# EAGLE board Qwiic_MLX90393_Magnetometer-Panel_v10 (EAGLE 7.7.0), part 1 of 6
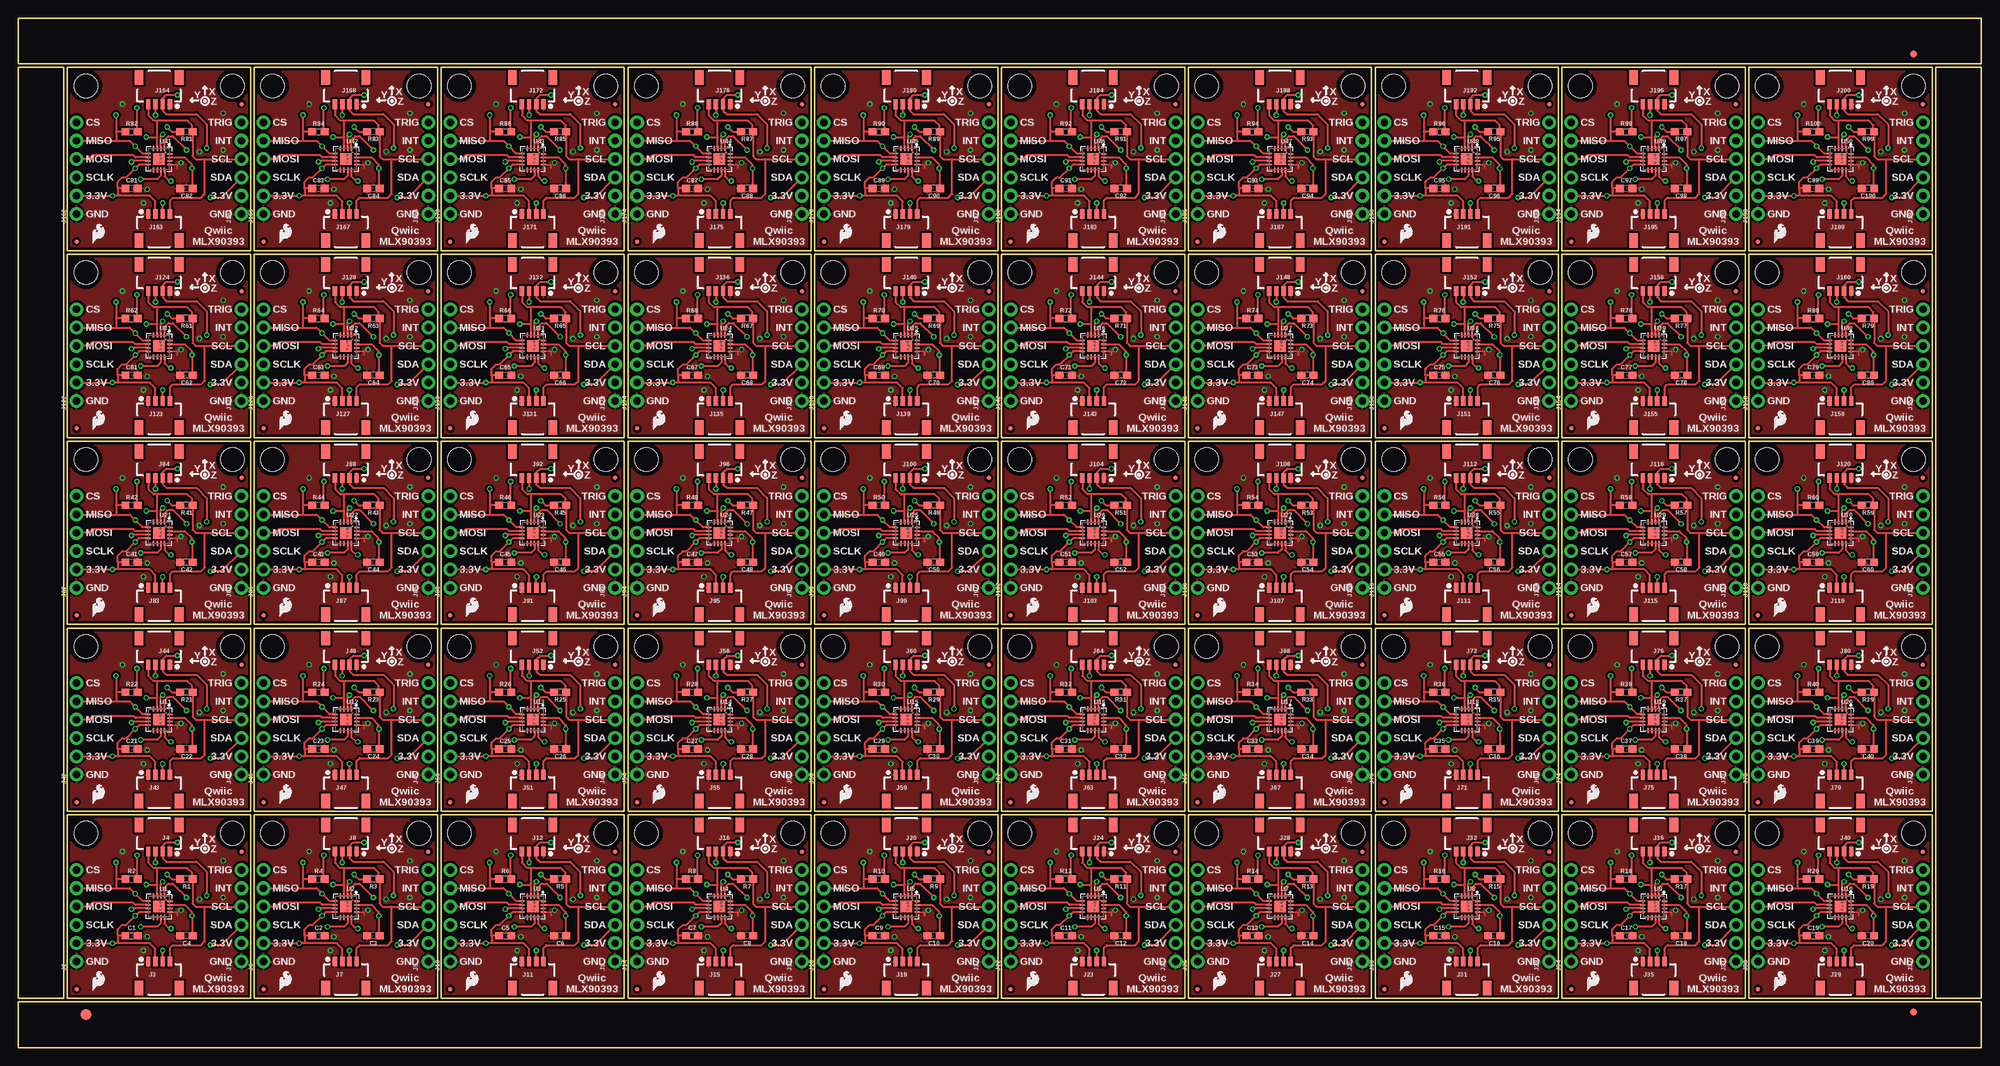
[diagram p0: board, top side]
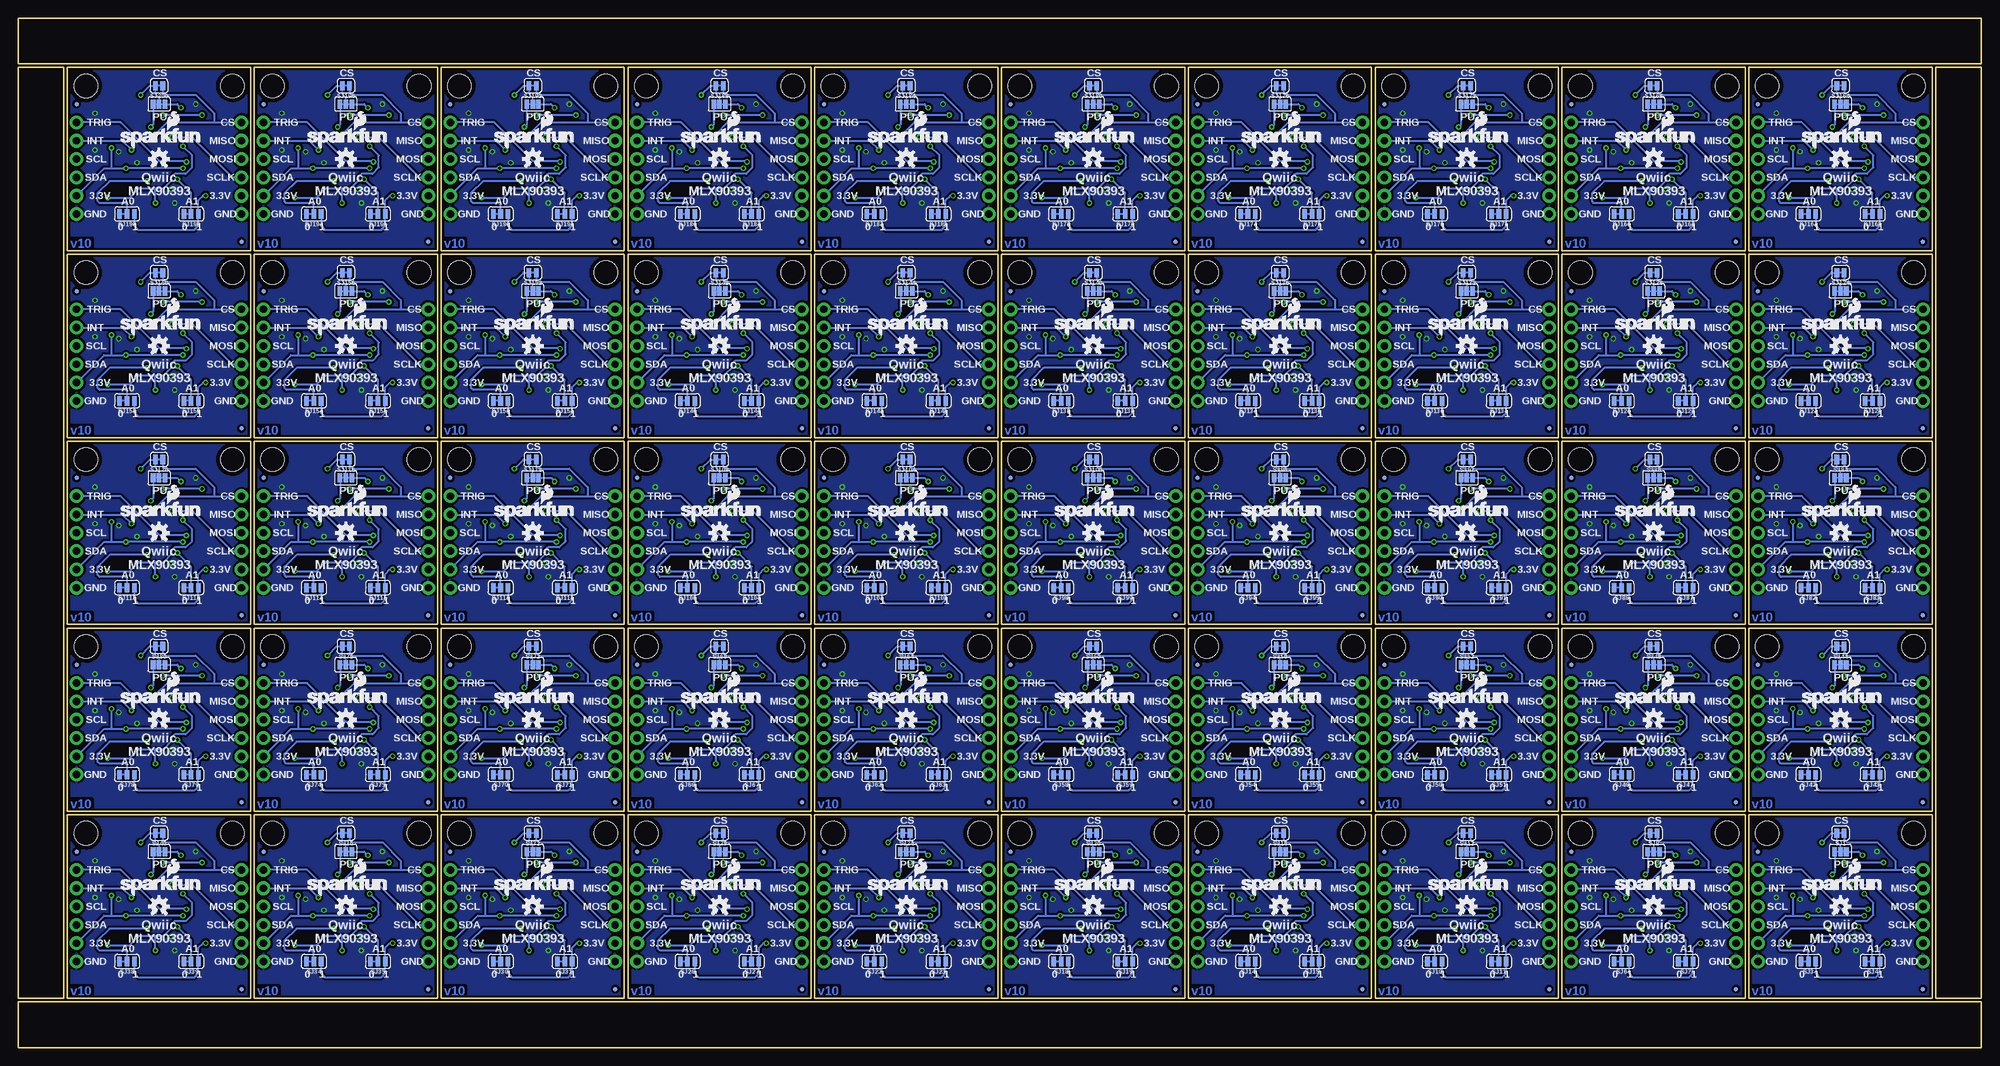
[diagram p1: board, bottom side, seen from below]

Size 272.29 x 142.75 mm. Coordinates in mm from the lower left corner, seen from the top.
Outline: 224 segments
Copper layers (1*16): Top 0.035mm / dielectric 1.5mm / Bottom 0.035mm
Design rules "SparkFun-2-layer-TIGHT": minimum track width 7mil, minimum drill 15mil, track to track 7mil, track to pad 7mil, pad to pad 7mil, via to via 7mil, smd to smd 7mil, copper to edge 7mil, drill to drill 7mil, minimum pad ring 7mil, minimum via ring 7mil, stop-mask expansion 4mil, vias tented up to drill 25mil, thermal gap 10mil

## Footprints (pad centres in the part's own frame; a part is rotated, then mirrored left to right if it is on the bottom)
0603 = smd 1.1 x 1: 1 -0.85,0; 2 0.85,0
FIDUCIAL-1.5X3 = smd 1.5 x 1.5: 1 0,0
FIDUCIAL-1X2 = smd 1 x 1: 1 0,0
FIDUCIAL-MICRO = smd 0.635 x 0.635: 1 0,0
1X06_NO_SILK = drill 1.016 pad 1.88: 1 0,0; 2 2.54,0; 3 5.08,0; 4 7.62,0; 5 10.16,0; 6 12.7,0
1X04_1MM_RA = smd 0.6 x 1.35: 1 -1.5,0; 2 -0.5,0; 3 0.5,0; 4 1.5,0 | smd 1.2 x 2: NC1 2.8,-3.675; NC2 -2.8,-3.675
STAND-OFF = hole 3.302: 0,0
SMT-JUMPER_2_NC_TRACE_SILK = smd 0.635 x 1.27: 1 -0.508,0; 2 0.508,0
PAD-JUMPER-3-3OF3_NC_BY_TRACE_YES_SILK_FULL_BOX = smd 0.635 x 1.27: 1 -0.813,0; 2 0,0; 3 0.813,0
SMT-JUMPER_3_1-NC_TRACE_SILK = smd 0.635 x 1.27: 1 -1.016,0; 2 0,0; 3 1.016,0
QFN-16_WITH_AXIES = smd 0.3 x 0.85: 1 0.754,1.498; 2 0.254,1.498; 3 -0.246,1.498; 4 -0.746,1.498; 9 -0.746,-1.506; 10 -0.246,-1.506; 11 0.254,-1.506; 12 0.754,-1.506 | smd 0.85 x 0.3: 5 -1.508,0.746; 6 -1.508,0.246; 7 -1.508,-0.254; 8 -1.508,-0.754; 13 1.496,-0.764; 14 1.496,-0.264; 15 1.496,0.236; 16 1.496,0.736 | smd 1.6 x 1.6: 17 0,0

## Placement (x,y rotation side)
C1  0.1uF  [0603]  15.75,15.49 0 top
C2  0.1uF  [0603]  41.66,15.49 0 top
C3  0.1uF  [0603]  49.28,15.49 180 top
C4  0.1uF  [0603]  23.37,15.49 180 top
C5  0.1uF  [0603]  67.56,15.49 0 top
C6  0.1uF  [0603]  75.18,15.49 180 top
C7  0.1uF  [0603]  93.47,15.49 0 top
C8  0.1uF  [0603]  101.09,15.49 180 top
C9  0.1uF  [0603]  119.38,15.49 0 top
C10  0.1uF  [0603]  127,15.49 180 top
C11  0.1uF  [0603]  145.29,15.49 0 top
C12  0.1uF  [0603]  152.91,15.49 180 top
C13  0.1uF  [0603]  171.2,15.49 0 top
C14  0.1uF  [0603]  178.82,15.49 180 top
C15  0.1uF  [0603]  197.1,15.49 0 top
C16  0.1uF  [0603]  204.72,15.49 180 top
C17  0.1uF  [0603]  223.01,15.49 0 top
C18  0.1uF  [0603]  230.63,15.49 180 top
C19  0.1uF  [0603]  248.92,15.49 0 top
C20  0.1uF  [0603]  256.54,15.49 180 top
C21  0.1uF  [0603]  15.75,41.4 0 top
C22  0.1uF  [0603]  23.37,41.4 180 top
C23  0.1uF  [0603]  41.66,41.4 0 top
C24  0.1uF  [0603]  49.28,41.4 180 top
C25  0.1uF  [0603]  67.56,41.4 0 top
C26  0.1uF  [0603]  75.18,41.4 180 top
C27  0.1uF  [0603]  93.47,41.4 0 top
C28  0.1uF  [0603]  101.09,41.4 180 top
C29  0.1uF  [0603]  119.38,41.4 0 top
C30  0.1uF  [0603]  127,41.4 180 top
C31  0.1uF  [0603]  145.29,41.4 0 top
C32  0.1uF  [0603]  152.91,41.4 180 top
C33  0.1uF  [0603]  171.2,41.4 0 top
C34  0.1uF  [0603]  178.82,41.4 180 top
C35  0.1uF  [0603]  197.1,41.4 0 top
C36  0.1uF  [0603]  204.72,41.4 180 top
C37  0.1uF  [0603]  223.01,41.4 0 top
C38  0.1uF  [0603]  230.63,41.4 180 top
C39  0.1uF  [0603]  248.92,41.4 0 top
C40  0.1uF  [0603]  256.54,41.4 180 top
C41  0.1uF  [0603]  15.75,67.31 0 top
C42  0.1uF  [0603]  23.37,67.31 180 top
C43  0.1uF  [0603]  41.66,67.31 0 top
C44  0.1uF  [0603]  49.28,67.31 180 top
C45  0.1uF  [0603]  67.56,67.31 0 top
C46  0.1uF  [0603]  75.18,67.31 180 top
C47  0.1uF  [0603]  93.47,67.31 0 top
C48  0.1uF  [0603]  101.09,67.31 180 top
C49  0.1uF  [0603]  119.38,67.31 0 top
C50  0.1uF  [0603]  127,67.31 180 top
C51  0.1uF  [0603]  145.29,67.31 0 top
C52  0.1uF  [0603]  152.91,67.31 180 top
C53  0.1uF  [0603]  171.2,67.31 0 top
C54  0.1uF  [0603]  178.82,67.31 180 top
C55  0.1uF  [0603]  197.1,67.31 0 top
C56  0.1uF  [0603]  204.72,67.31 180 top
C57  0.1uF  [0603]  223.01,67.31 0 top
C58  0.1uF  [0603]  230.63,67.31 180 top
C59  0.1uF  [0603]  248.92,67.31 0 top
C60  0.1uF  [0603]  256.54,67.31 180 top
C61  0.1uF  [0603]  15.75,93.22 0 top
C62  0.1uF  [0603]  23.37,93.22 180 top
C63  0.1uF  [0603]  41.66,93.22 0 top
C64  0.1uF  [0603]  49.28,93.22 180 top
C65  0.1uF  [0603]  67.56,93.22 0 top
C66  0.1uF  [0603]  75.18,93.22 180 top
C67  0.1uF  [0603]  93.47,93.22 0 top
C68  0.1uF  [0603]  101.09,93.22 180 top
C69  0.1uF  [0603]  119.38,93.22 0 top
C70  0.1uF  [0603]  127,93.22 180 top
C71  0.1uF  [0603]  145.29,93.22 0 top
C72  0.1uF  [0603]  152.91,93.22 180 top
C73  0.1uF  [0603]  171.2,93.22 0 top
C74  0.1uF  [0603]  178.82,93.22 180 top
C75  0.1uF  [0603]  197.1,93.22 0 top
C76  0.1uF  [0603]  204.72,93.22 180 top
C77  0.1uF  [0603]  223.01,93.22 0 top
C78  0.1uF  [0603]  230.63,93.22 180 top
C79  0.1uF  [0603]  248.92,93.22 0 top
C80  0.1uF  [0603]  256.54,93.22 180 top
C81  0.1uF  [0603]  15.75,119.13 0 top
C82  0.1uF  [0603]  23.37,119.13 180 top
C83  0.1uF  [0603]  41.66,119.13 0 top
C84  0.1uF  [0603]  49.28,119.13 180 top
C85  0.1uF  [0603]  67.56,119.13 0 top
C86  0.1uF  [0603]  75.18,119.13 180 top
C87  0.1uF  [0603]  93.47,119.13 0 top
C88  0.1uF  [0603]  101.09,119.13 180 top
C89  0.1uF  [0603]  119.38,119.13 0 top
C90  0.1uF  [0603]  127,119.13 180 top
C91  0.1uF  [0603]  145.29,119.13 0 top
C92  0.1uF  [0603]  152.91,119.13 180 top
C93  0.1uF  [0603]  171.2,119.13 0 top
C94  0.1uF  [0603]  178.82,119.13 180 top
C95  0.1uF  [0603]  197.1,119.13 0 top
C96  0.1uF  [0603]  204.72,119.13 180 top
C97  0.1uF  [0603]  223.01,119.13 0 top
C98  0.1uF  [0603]  230.63,119.13 180 top
C99  0.1uF  [0603]  248.92,119.13 0 top
C100  0.1uF  [0603]  256.54,119.13 180 top
E$1  [FIDUCIAL-1.5X3]  9.4,4.57 0 top
E$6  [FIDUCIAL-1X2]  262.89,4.95 90 top
E$7  [FIDUCIAL-1X2]  262.89,137.79 90 top
FD1  FIDUCIALUFIDUCIAL  [FIDUCIAL-MICRO]  8.13,8.13 0 top
FD2  FIDUCIALUFIDUCIAL  [FIDUCIAL-MICRO]  8.13,8.13 0 bottom
FD3  FIDUCIALUFIDUCIAL  [FIDUCIAL-MICRO]  30.99,27.18 0 top
FD4  FIDUCIALUFIDUCIAL  [FIDUCIAL-MICRO]  30.99,27.18 0 bottom
FD5  FIDUCIALUFIDUCIAL  [FIDUCIAL-MICRO]  34.04,8.13 0 top
FD6  FIDUCIALUFIDUCIAL  [FIDUCIAL-MICRO]  34.04,8.13 0 bottom
FD7  FIDUCIALUFIDUCIAL  [FIDUCIAL-MICRO]  56.9,27.18 0 top
FD8  FIDUCIALUFIDUCIAL  [FIDUCIAL-MICRO]  56.9,27.18 0 bottom
FD9  FIDUCIALUFIDUCIAL  [FIDUCIAL-MICRO]  59.94,8.13 0 top
FD10  FIDUCIALUFIDUCIAL  [FIDUCIAL-MICRO]  59.94,8.13 0 bottom
FD11  FIDUCIALUFIDUCIAL  [FIDUCIAL-MICRO]  82.8,27.18 0 top
FD12  FIDUCIALUFIDUCIAL  [FIDUCIAL-MICRO]  82.8,27.18 0 bottom
FD13  FIDUCIALUFIDUCIAL  [FIDUCIAL-MICRO]  85.85,8.13 0 top
FD14  FIDUCIALUFIDUCIAL  [FIDUCIAL-MICRO]  85.85,8.13 0 bottom
FD15  FIDUCIALUFIDUCIAL  [FIDUCIAL-MICRO]  108.71,27.18 0 top
FD16  FIDUCIALUFIDUCIAL  [FIDUCIAL-MICRO]  108.71,27.18 0 bottom
FD17  FIDUCIALUFIDUCIAL  [FIDUCIAL-MICRO]  111.76,8.13 0 top
FD18  FIDUCIALUFIDUCIAL  [FIDUCIAL-MICRO]  111.76,8.13 0 bottom
FD19  FIDUCIALUFIDUCIAL  [FIDUCIAL-MICRO]  134.62,27.18 0 top
FD20  FIDUCIALUFIDUCIAL  [FIDUCIAL-MICRO]  134.62,27.18 0 bottom
FD21  FIDUCIALUFIDUCIAL  [FIDUCIAL-MICRO]  137.67,8.13 0 top
FD22  FIDUCIALUFIDUCIAL  [FIDUCIAL-MICRO]  137.67,8.13 0 bottom
FD23  FIDUCIALUFIDUCIAL  [FIDUCIAL-MICRO]  160.53,27.18 0 top
FD24  FIDUCIALUFIDUCIAL  [FIDUCIAL-MICRO]  160.53,27.18 0 bottom
FD25  FIDUCIALUFIDUCIAL  [FIDUCIAL-MICRO]  163.58,8.13 0 top
FD26  FIDUCIALUFIDUCIAL  [FIDUCIAL-MICRO]  163.58,8.13 0 bottom
FD27  FIDUCIALUFIDUCIAL  [FIDUCIAL-MICRO]  186.44,27.18 0 top
FD28  FIDUCIALUFIDUCIAL  [FIDUCIAL-MICRO]  186.44,27.18 0 bottom
FD29  FIDUCIALUFIDUCIAL  [FIDUCIAL-MICRO]  189.48,8.13 0 top
FD30  FIDUCIALUFIDUCIAL  [FIDUCIAL-MICRO]  189.48,8.13 0 bottom
FD31  FIDUCIALUFIDUCIAL  [FIDUCIAL-MICRO]  212.34,27.18 0 top
FD32  FIDUCIALUFIDUCIAL  [FIDUCIAL-MICRO]  212.34,27.18 0 bottom
FD33  FIDUCIALUFIDUCIAL  [FIDUCIAL-MICRO]  215.39,8.13 0 top
FD34  FIDUCIALUFIDUCIAL  [FIDUCIAL-MICRO]  215.39,8.13 0 bottom
FD35  FIDUCIALUFIDUCIAL  [FIDUCIAL-MICRO]  238.25,27.18 0 top
FD36  FIDUCIALUFIDUCIAL  [FIDUCIAL-MICRO]  238.25,27.18 0 bottom
FD37  FIDUCIALUFIDUCIAL  [FIDUCIAL-MICRO]  241.3,8.13 0 top
FD38  FIDUCIALUFIDUCIAL  [FIDUCIAL-MICRO]  241.3,8.13 0 bottom
FD39  FIDUCIALUFIDUCIAL  [FIDUCIAL-MICRO]  264.16,27.18 0 top
FD40  FIDUCIALUFIDUCIAL  [FIDUCIAL-MICRO]  264.16,27.18 0 bottom
FD41  FIDUCIALUFIDUCIAL  [FIDUCIAL-MICRO]  8.13,34.04 0 top
FD42  FIDUCIALUFIDUCIAL  [FIDUCIAL-MICRO]  8.13,34.04 0 bottom
FD43  FIDUCIALUFIDUCIAL  [FIDUCIAL-MICRO]  30.99,53.09 0 top
FD44  FIDUCIALUFIDUCIAL  [FIDUCIAL-MICRO]  30.99,53.09 0 bottom
FD45  FIDUCIALUFIDUCIAL  [FIDUCIAL-MICRO]  34.04,34.04 0 top
FD46  FIDUCIALUFIDUCIAL  [FIDUCIAL-MICRO]  34.04,34.04 0 bottom
FD47  FIDUCIALUFIDUCIAL  [FIDUCIAL-MICRO]  56.9,53.09 0 top
FD48  FIDUCIALUFIDUCIAL  [FIDUCIAL-MICRO]  56.9,53.09 0 bottom
FD49  FIDUCIALUFIDUCIAL  [FIDUCIAL-MICRO]  59.94,34.04 0 top
FD50  FIDUCIALUFIDUCIAL  [FIDUCIAL-MICRO]  59.94,34.04 0 bottom
FD51  FIDUCIALUFIDUCIAL  [FIDUCIAL-MICRO]  82.8,53.09 0 top
FD52  FIDUCIALUFIDUCIAL  [FIDUCIAL-MICRO]  82.8,53.09 0 bottom
FD53  FIDUCIALUFIDUCIAL  [FIDUCIAL-MICRO]  85.85,34.04 0 top
FD54  FIDUCIALUFIDUCIAL  [FIDUCIAL-MICRO]  85.85,34.04 0 bottom
FD55  FIDUCIALUFIDUCIAL  [FIDUCIAL-MICRO]  108.71,53.09 0 top
FD56  FIDUCIALUFIDUCIAL  [FIDUCIAL-MICRO]  108.71,53.09 0 bottom
FD57  FIDUCIALUFIDUCIAL  [FIDUCIAL-MICRO]  111.76,34.04 0 top
FD58  FIDUCIALUFIDUCIAL  [FIDUCIAL-MICRO]  111.76,34.04 0 bottom
FD59  FIDUCIALUFIDUCIAL  [FIDUCIAL-MICRO]  134.62,53.09 0 top
FD60  FIDUCIALUFIDUCIAL  [FIDUCIAL-MICRO]  134.62,53.09 0 bottom
FD61  FIDUCIALUFIDUCIAL  [FIDUCIAL-MICRO]  137.67,34.04 0 top
FD62  FIDUCIALUFIDUCIAL  [FIDUCIAL-MICRO]  137.67,34.04 0 bottom
FD63  FIDUCIALUFIDUCIAL  [FIDUCIAL-MICRO]  160.53,53.09 0 top
FD64  FIDUCIALUFIDUCIAL  [FIDUCIAL-MICRO]  160.53,53.09 0 bottom
FD65  FIDUCIALUFIDUCIAL  [FIDUCIAL-MICRO]  163.58,34.04 0 top
FD66  FIDUCIALUFIDUCIAL  [FIDUCIAL-MICRO]  163.58,34.04 0 bottom
FD67  FIDUCIALUFIDUCIAL  [FIDUCIAL-MICRO]  186.44,53.09 0 top
FD68  FIDUCIALUFIDUCIAL  [FIDUCIAL-MICRO]  186.44,53.09 0 bottom
FD69  FIDUCIALUFIDUCIAL  [FIDUCIAL-MICRO]  189.48,34.04 0 top
FD70  FIDUCIALUFIDUCIAL  [FIDUCIAL-MICRO]  189.48,34.04 0 bottom
FD71  FIDUCIALUFIDUCIAL  [FIDUCIAL-MICRO]  212.34,53.09 0 top
FD72  FIDUCIALUFIDUCIAL  [FIDUCIAL-MICRO]  212.34,53.09 0 bottom
FD73  FIDUCIALUFIDUCIAL  [FIDUCIAL-MICRO]  215.39,34.04 0 top
FD74  FIDUCIALUFIDUCIAL  [FIDUCIAL-MICRO]  215.39,34.04 0 bottom
FD75  FIDUCIALUFIDUCIAL  [FIDUCIAL-MICRO]  238.25,53.09 0 top
FD76  FIDUCIALUFIDUCIAL  [FIDUCIAL-MICRO]  238.25,53.09 0 bottom
FD77  FIDUCIALUFIDUCIAL  [FIDUCIAL-MICRO]  241.3,34.04 0 top
FD78  FIDUCIALUFIDUCIAL  [FIDUCIAL-MICRO]  241.3,34.04 0 bottom
FD79  FIDUCIALUFIDUCIAL  [FIDUCIAL-MICRO]  264.16,53.09 0 top
FD80  FIDUCIALUFIDUCIAL  [FIDUCIAL-MICRO]  264.16,53.09 0 bottom
FD81  FIDUCIALUFIDUCIAL  [FIDUCIAL-MICRO]  8.13,59.94 0 top
FD82  FIDUCIALUFIDUCIAL  [FIDUCIAL-MICRO]  8.13,59.94 0 bottom
FD83  FIDUCIALUFIDUCIAL  [FIDUCIAL-MICRO]  30.99,78.99 0 top
FD84  FIDUCIALUFIDUCIAL  [FIDUCIAL-MICRO]  30.99,78.99 0 bottom
FD85  FIDUCIALUFIDUCIAL  [FIDUCIAL-MICRO]  34.04,59.94 0 top
FD86  FIDUCIALUFIDUCIAL  [FIDUCIAL-MICRO]  34.04,59.94 0 bottom
FD87  FIDUCIALUFIDUCIAL  [FIDUCIAL-MICRO]  56.9,78.99 0 top
FD88  FIDUCIALUFIDUCIAL  [FIDUCIAL-MICRO]  56.9,78.99 0 bottom
FD89  FIDUCIALUFIDUCIAL  [FIDUCIAL-MICRO]  59.94,59.94 0 top
FD90  FIDUCIALUFIDUCIAL  [FIDUCIAL-MICRO]  59.94,59.94 0 bottom
FD91  FIDUCIALUFIDUCIAL  [FIDUCIAL-MICRO]  82.8,78.99 0 top
FD92  FIDUCIALUFIDUCIAL  [FIDUCIAL-MICRO]  82.8,78.99 0 bottom
FD93  FIDUCIALUFIDUCIAL  [FIDUCIAL-MICRO]  85.85,59.94 0 top
FD94  FIDUCIALUFIDUCIAL  [FIDUCIAL-MICRO]  85.85,59.94 0 bottom
FD95  FIDUCIALUFIDUCIAL  [FIDUCIAL-MICRO]  108.71,78.99 0 top
FD96  FIDUCIALUFIDUCIAL  [FIDUCIAL-MICRO]  108.71,78.99 0 bottom
FD97  FIDUCIALUFIDUCIAL  [FIDUCIAL-MICRO]  111.76,59.94 0 top
FD98  FIDUCIALUFIDUCIAL  [FIDUCIAL-MICRO]  111.76,59.94 0 bottom
FD99  FIDUCIALUFIDUCIAL  [FIDUCIAL-MICRO]  134.62,78.99 0 top
FD100  FIDUCIALUFIDUCIAL  [FIDUCIAL-MICRO]  134.62,78.99 0 bottom
FD101  FIDUCIALUFIDUCIAL  [FIDUCIAL-MICRO]  137.67,59.94 0 top
FD102  FIDUCIALUFIDUCIAL  [FIDUCIAL-MICRO]  137.67,59.94 0 bottom
FD103  FIDUCIALUFIDUCIAL  [FIDUCIAL-MICRO]  160.53,78.99 0 top
FD104  FIDUCIALUFIDUCIAL  [FIDUCIAL-MICRO]  160.53,78.99 0 bottom
FD105  FIDUCIALUFIDUCIAL  [FIDUCIAL-MICRO]  163.58,59.94 0 top
FD106  FIDUCIALUFIDUCIAL  [FIDUCIAL-MICRO]  163.58,59.94 0 bottom
FD107  FIDUCIALUFIDUCIAL  [FIDUCIAL-MICRO]  186.44,78.99 0 top
FD108  FIDUCIALUFIDUCIAL  [FIDUCIAL-MICRO]  186.44,78.99 0 bottom
FD109  FIDUCIALUFIDUCIAL  [FIDUCIAL-MICRO]  189.48,59.94 0 top
FD110  FIDUCIALUFIDUCIAL  [FIDUCIAL-MICRO]  189.48,59.94 0 bottom
FD111  FIDUCIALUFIDUCIAL  [FIDUCIAL-MICRO]  212.34,78.99 0 top
FD112  FIDUCIALUFIDUCIAL  [FIDUCIAL-MICRO]  212.34,78.99 0 bottom
FD113  FIDUCIALUFIDUCIAL  [FIDUCIAL-MICRO]  215.39,59.94 0 top
FD114  FIDUCIALUFIDUCIAL  [FIDUCIAL-MICRO]  215.39,59.94 0 bottom
FD115  FIDUCIALUFIDUCIAL  [FIDUCIAL-MICRO]  238.25,78.99 0 top
FD116  FIDUCIALUFIDUCIAL  [FIDUCIAL-MICRO]  238.25,78.99 0 bottom
FD117  FIDUCIALUFIDUCIAL  [FIDUCIAL-MICRO]  241.3,59.94 0 top
FD118  FIDUCIALUFIDUCIAL  [FIDUCIAL-MICRO]  241.3,59.94 0 bottom
FD119  FIDUCIALUFIDUCIAL  [FIDUCIAL-MICRO]  264.16,78.99 0 top
FD120  FIDUCIALUFIDUCIAL  [FIDUCIAL-MICRO]  264.16,78.99 0 bottom
FD121  FIDUCIALUFIDUCIAL  [FIDUCIAL-MICRO]  8.13,85.85 0 top
FD122  FIDUCIALUFIDUCIAL  [FIDUCIAL-MICRO]  8.13,85.85 0 bottom
FD123  FIDUCIALUFIDUCIAL  [FIDUCIAL-MICRO]  30.99,104.9 0 top
FD124  FIDUCIALUFIDUCIAL  [FIDUCIAL-MICRO]  30.99,104.9 0 bottom
FD125  FIDUCIALUFIDUCIAL  [FIDUCIAL-MICRO]  34.04,85.85 0 top
FD126  FIDUCIALUFIDUCIAL  [FIDUCIAL-MICRO]  34.04,85.85 0 bottom
FD127  FIDUCIALUFIDUCIAL  [FIDUCIAL-MICRO]  56.9,104.9 0 top
FD128  FIDUCIALUFIDUCIAL  [FIDUCIAL-MICRO]  56.9,104.9 0 bottom
FD129  FIDUCIALUFIDUCIAL  [FIDUCIAL-MICRO]  59.94,85.85 0 top
FD130  FIDUCIALUFIDUCIAL  [FIDUCIAL-MICRO]  59.94,85.85 0 bottom
FD131  FIDUCIALUFIDUCIAL  [FIDUCIAL-MICRO]  82.8,104.9 0 top
FD132  FIDUCIALUFIDUCIAL  [FIDUCIAL-MICRO]  82.8,104.9 0 bottom
FD133  FIDUCIALUFIDUCIAL  [FIDUCIAL-MICRO]  85.85,85.85 0 top
FD134  FIDUCIALUFIDUCIAL  [FIDUCIAL-MICRO]  85.85,85.85 0 bottom
FD135  FIDUCIALUFIDUCIAL  [FIDUCIAL-MICRO]  108.71,104.9 0 top
FD136  FIDUCIALUFIDUCIAL  [FIDUCIAL-MICRO]  108.71,104.9 0 bottom
FD137  FIDUCIALUFIDUCIAL  [FIDUCIAL-MICRO]  111.76,85.85 0 top
FD138  FIDUCIALUFIDUCIAL  [FIDUCIAL-MICRO]  111.76,85.85 0 bottom
FD139  FIDUCIALUFIDUCIAL  [FIDUCIAL-MICRO]  134.62,104.9 0 top
FD140  FIDUCIALUFIDUCIAL  [FIDUCIAL-MICRO]  134.62,104.9 0 bottom
FD141  FIDUCIALUFIDUCIAL  [FIDUCIAL-MICRO]  137.67,85.85 0 top
FD142  FIDUCIALUFIDUCIAL  [FIDUCIAL-MICRO]  137.67,85.85 0 bottom
FD143  FIDUCIALUFIDUCIAL  [FIDUCIAL-MICRO]  160.53,104.9 0 top
FD144  FIDUCIALUFIDUCIAL  [FIDUCIAL-MICRO]  160.53,104.9 0 bottom
FD145  FIDUCIALUFIDUCIAL  [FIDUCIAL-MICRO]  163.58,85.85 0 top
FD146  FIDUCIALUFIDUCIAL  [FIDUCIAL-MICRO]  163.58,85.85 0 bottom
FD147  FIDUCIALUFIDUCIAL  [FIDUCIAL-MICRO]  186.44,104.9 0 top
FD148  FIDUCIALUFIDUCIAL  [FIDUCIAL-MICRO]  186.44,104.9 0 bottom
FD149  FIDUCIALUFIDUCIAL  [FIDUCIAL-MICRO]  189.48,85.85 0 top
FD150  FIDUCIALUFIDUCIAL  [FIDUCIAL-MICRO]  189.48,85.85 0 bottom
FD151  FIDUCIALUFIDUCIAL  [FIDUCIAL-MICRO]  212.34,104.9 0 top
FD152  FIDUCIALUFIDUCIAL  [FIDUCIAL-MICRO]  212.34,104.9 0 bottom
FD153  FIDUCIALUFIDUCIAL  [FIDUCIAL-MICRO]  215.39,85.85 0 top
FD154  FIDUCIALUFIDUCIAL  [FIDUCIAL-MICRO]  215.39,85.85 0 bottom
FD155  FIDUCIALUFIDUCIAL  [FIDUCIAL-MICRO]  238.25,104.9 0 top
FD156  FIDUCIALUFIDUCIAL  [FIDUCIAL-MICRO]  238.25,104.9 0 bottom
FD157  FIDUCIALUFIDUCIAL  [FIDUCIAL-MICRO]  241.3,85.85 0 top
FD158  FIDUCIALUFIDUCIAL  [FIDUCIAL-MICRO]  241.3,85.85 0 bottom
FD159  FIDUCIALUFIDUCIAL  [FIDUCIAL-MICRO]  264.16,104.9 0 top
FD160  FIDUCIALUFIDUCIAL  [FIDUCIAL-MICRO]  264.16,104.9 0 bottom
FD161  FIDUCIALUFIDUCIAL  [FIDUCIAL-MICRO]  8.13,111.76 0 top
FD162  FIDUCIALUFIDUCIAL  [FIDUCIAL-MICRO]  8.13,111.76 0 bottom
FD163  FIDUCIALUFIDUCIAL  [FIDUCIAL-MICRO]  30.99,130.81 0 top
FD164  FIDUCIALUFIDUCIAL  [FIDUCIAL-MICRO]  30.99,130.81 0 bottom
FD165  FIDUCIALUFIDUCIAL  [FIDUCIAL-MICRO]  34.04,111.76 0 top
FD166  FIDUCIALUFIDUCIAL  [FIDUCIAL-MICRO]  34.04,111.76 0 bottom
FD167  FIDUCIALUFIDUCIAL  [FIDUCIAL-MICRO]  56.9,130.81 0 top
FD168  FIDUCIALUFIDUCIAL  [FIDUCIAL-MICRO]  56.9,130.81 0 bottom
FD169  FIDUCIALUFIDUCIAL  [FIDUCIAL-MICRO]  59.94,111.76 0 top
FD170  FIDUCIALUFIDUCIAL  [FIDUCIAL-MICRO]  59.94,111.76 0 bottom
FD171  FIDUCIALUFIDUCIAL  [FIDUCIAL-MICRO]  82.8,130.81 0 top
FD172  FIDUCIALUFIDUCIAL  [FIDUCIAL-MICRO]  82.8,130.81 0 bottom
FD173  FIDUCIALUFIDUCIAL  [FIDUCIAL-MICRO]  85.85,111.76 0 top
FD174  FIDUCIALUFIDUCIAL  [FIDUCIAL-MICRO]  85.85,111.76 0 bottom
FD175  FIDUCIALUFIDUCIAL  [FIDUCIAL-MICRO]  108.71,130.81 0 top
FD176  FIDUCIALUFIDUCIAL  [FIDUCIAL-MICRO]  108.71,130.81 0 bottom
FD177  FIDUCIALUFIDUCIAL  [FIDUCIAL-MICRO]  111.76,111.76 0 top
FD178  FIDUCIALUFIDUCIAL  [FIDUCIAL-MICRO]  111.76,111.76 0 bottom
FD179  FIDUCIALUFIDUCIAL  [FIDUCIAL-MICRO]  134.62,130.81 0 top
FD180  FIDUCIALUFIDUCIAL  [FIDUCIAL-MICRO]  134.62,130.81 0 bottom
FD181  FIDUCIALUFIDUCIAL  [FIDUCIAL-MICRO]  137.67,111.76 0 top
FD182  FIDUCIALUFIDUCIAL  [FIDUCIAL-MICRO]  137.67,111.76 0 bottom
FD183  FIDUCIALUFIDUCIAL  [FIDUCIAL-MICRO]  160.53,130.81 0 top
FD184  FIDUCIALUFIDUCIAL  [FIDUCIAL-MICRO]  160.53,130.81 0 bottom
FD185  FIDUCIALUFIDUCIAL  [FIDUCIAL-MICRO]  163.58,111.76 0 top
FD186  FIDUCIALUFIDUCIAL  [FIDUCIAL-MICRO]  163.58,111.76 0 bottom
FD187  FIDUCIALUFIDUCIAL  [FIDUCIAL-MICRO]  186.44,130.81 0 top
FD188  FIDUCIALUFIDUCIAL  [FIDUCIAL-MICRO]  186.44,130.81 0 bottom
FD189  FIDUCIALUFIDUCIAL  [FIDUCIAL-MICRO]  189.48,111.76 0 top
FD190  FIDUCIALUFIDUCIAL  [FIDUCIAL-MICRO]  189.48,111.76 0 bottom
FD191  FIDUCIALUFIDUCIAL  [FIDUCIAL-MICRO]  212.34,130.81 0 top
FD192  FIDUCIALUFIDUCIAL  [FIDUCIAL-MICRO]  212.34,130.81 0 bottom
FD193  FIDUCIALUFIDUCIAL  [FIDUCIAL-MICRO]  215.39,111.76 0 top
FD194  FIDUCIALUFIDUCIAL  [FIDUCIAL-MICRO]  215.39,111.76 0 bottom
FD195  FIDUCIALUFIDUCIAL  [FIDUCIAL-MICRO]  238.25,130.81 0 top
FD196  FIDUCIALUFIDUCIAL  [FIDUCIAL-MICRO]  238.25,130.81 0 bottom
FD197  FIDUCIALUFIDUCIAL  [FIDUCIAL-MICRO]  241.3,111.76 0 top
FD198  FIDUCIALUFIDUCIAL  [FIDUCIAL-MICRO]  241.3,111.76 0 bottom
FD199  FIDUCIALUFIDUCIAL  [FIDUCIAL-MICRO]  264.16,130.81 0 top
FD200  FIDUCIALUFIDUCIAL  [FIDUCIAL-MICRO]  264.16,130.81 0 bottom
J1  [1X06_NO_SILK]  30.99,11.94 90 top
J2  [1X06_NO_SILK]  8.13,11.94 90 top
J3  [1X04_1MM_RA]  19.56,11.94 0 top
J4  [1X04_1MM_RA]  19.56,27.18 180 top
J5  [1X06_NO_SILK]  56.9,11.94 90 top
J6  [1X06_NO_SILK]  34.04,11.94 90 top
J7  [1X04_1MM_RA]  45.47,11.94 0 top
J8  [1X04_1MM_RA]  45.47,27.18 180 top
J9  [1X06_NO_SILK]  82.8,11.94 90 top
J10  [1X06_NO_SILK]  59.94,11.94 90 top
J11  [1X04_1MM_RA]  71.37,11.94 0 top
J12  [1X04_1MM_RA]  71.37,27.18 180 top
J13  [1X06_NO_SILK]  108.71,11.94 90 top
J14  [1X06_NO_SILK]  85.85,11.94 90 top
J15  [1X04_1MM_RA]  97.28,11.94 0 top
J16  [1X04_1MM_RA]  97.28,27.18 180 top
J17  [1X06_NO_SILK]  134.62,11.94 90 top
J18  [1X06_NO_SILK]  111.76,11.94 90 top
J19  [1X04_1MM_RA]  123.19,11.94 0 top
J20  [1X04_1MM_RA]  123.19,27.18 180 top
J21  [1X06_NO_SILK]  160.53,11.94 90 top
J22  [1X06_NO_SILK]  137.67,11.94 90 top
J23  [1X04_1MM_RA]  149.1,11.94 0 top
J24  [1X04_1MM_RA]  149.1,27.18 180 top
J25  [1X06_NO_SILK]  186.44,11.94 90 top
J26  [1X06_NO_SILK]  163.58,11.94 90 top
J27  [1X04_1MM_RA]  175.01,11.94 0 top
J28  [1X04_1MM_RA]  175.01,27.18 180 top
J29  [1X06_NO_SILK]  212.34,11.94 90 top
J30  [1X06_NO_SILK]  189.48,11.94 90 top
J31  [1X04_1MM_RA]  200.91,11.94 0 top
J32  [1X04_1MM_RA]  200.91,27.18 180 top
J33  [1X06_NO_SILK]  238.25,11.94 90 top
J34  [1X06_NO_SILK]  215.39,11.94 90 top
J35  [1X04_1MM_RA]  226.82,11.94 0 top
J36  [1X04_1MM_RA]  226.82,27.18 180 top
J37  [1X06_NO_SILK]  264.16,11.94 90 top
J38  [1X06_NO_SILK]  241.3,11.94 90 top
J39  [1X04_1MM_RA]  252.73,11.94 0 top
J40  [1X04_1MM_RA]  252.73,27.18 180 top
J41  [1X06_NO_SILK]  30.99,37.85 90 top
J42  [1X06_NO_SILK]  8.13,37.85 90 top
J43  [1X04_1MM_RA]  19.56,37.85 0 top
J44  [1X04_1MM_RA]  19.56,53.09 180 top
J45  [1X06_NO_SILK]  56.9,37.85 90 top
J46  [1X06_NO_SILK]  34.04,37.85 90 top
J47  [1X04_1MM_RA]  45.47,37.85 0 top
J48  [1X04_1MM_RA]  45.47,53.09 180 top
J49  [1X06_NO_SILK]  82.8,37.85 90 top
J50  [1X06_NO_SILK]  59.94,37.85 90 top
J51  [1X04_1MM_RA]  71.37,37.85 0 top
J52  [1X04_1MM_RA]  71.37,53.09 180 top
J53  [1X06_NO_SILK]  108.71,37.85 90 top
J54  [1X06_NO_SILK]  85.85,37.85 90 top
J55  [1X04_1MM_RA]  97.28,37.85 0 top
J56  [1X04_1MM_RA]  97.28,53.09 180 top
J57  [1X06_NO_SILK]  134.62,37.85 90 top
J58  [1X06_NO_SILK]  111.76,37.85 90 top
J59  [1X04_1MM_RA]  123.19,37.85 0 top
J60  [1X04_1MM_RA]  123.19,53.09 180 top
J61  [1X06_NO_SILK]  160.53,37.85 90 top
J62  [1X06_NO_SILK]  137.67,37.85 90 top
J63  [1X04_1MM_RA]  149.1,37.85 0 top
J64  [1X04_1MM_RA]  149.1,53.09 180 top
J65  [1X06_NO_SILK]  186.44,37.85 90 top
J66  [1X06_NO_SILK]  163.58,37.85 90 top
J67  [1X04_1MM_RA]  175.01,37.85 0 top
J68  [1X04_1MM_RA]  175.01,53.09 180 top
J69  [1X06_NO_SILK]  212.34,37.85 90 top
J70  [1X06_NO_SILK]  189.48,37.85 90 top
J71  [1X04_1MM_RA]  200.91,37.85 0 top
J72  [1X04_1MM_RA]  200.91,53.09 180 top
J73  [1X06_NO_SILK]  238.25,37.85 90 top
J74  [1X06_NO_SILK]  215.39,37.85 90 top
J75  [1X04_1MM_RA]  226.82,37.85 0 top
J76  [1X04_1MM_RA]  226.82,53.09 180 top
J77  [1X06_NO_SILK]  264.16,37.85 90 top
J78  [1X06_NO_SILK]  241.3,37.85 90 top
J79  [1X04_1MM_RA]  252.73,37.85 0 top
J80  [1X04_1MM_RA]  252.73,53.09 180 top
J81  [1X06_NO_SILK]  30.99,63.75 90 top
J82  [1X06_NO_SILK]  8.13,63.75 90 top
J83  [1X04_1MM_RA]  19.56,63.75 0 top
J84  [1X04_1MM_RA]  19.56,78.99 180 top
J85  [1X06_NO_SILK]  56.9,63.75 90 top
J86  [1X06_NO_SILK]  34.04,63.75 90 top
J87  [1X04_1MM_RA]  45.47,63.75 0 top
J88  [1X04_1MM_RA]  45.47,78.99 180 top
J89  [1X06_NO_SILK]  82.8,63.75 90 top
J90  [1X06_NO_SILK]  59.94,63.75 90 top
J91  [1X04_1MM_RA]  71.37,63.75 0 top
J92  [1X04_1MM_RA]  71.37,78.99 180 top
J93  [1X06_NO_SILK]  108.71,63.75 90 top
J94  [1X06_NO_SILK]  85.85,63.75 90 top
J95  [1X04_1MM_RA]  97.28,63.75 0 top
J96  [1X04_1MM_RA]  97.28,78.99 180 top
J97  [1X06_NO_SILK]  134.62,63.75 90 top
J98  [1X06_NO_SILK]  111.76,63.75 90 top
J99  [1X04_1MM_RA]  123.19,63.75 0 top
J100  [1X04_1MM_RA]  123.19,78.99 180 top
J101  [1X06_NO_SILK]  160.53,63.75 90 top
J102  [1X06_NO_SILK]  137.67,63.75 90 top
J103  [1X04_1MM_RA]  149.1,63.75 0 top
J104  [1X04_1MM_RA]  149.1,78.99 180 top
J105  [1X06_NO_SILK]  186.44,63.75 90 top
J106  [1X06_NO_SILK]  163.58,63.75 90 top
J107  [1X04_1MM_RA]  175.01,63.75 0 top
J108  [1X04_1MM_RA]  175.01,78.99 180 top
J109  [1X06_NO_SILK]  212.34,63.75 90 top
J110  [1X06_NO_SILK]  189.48,63.75 90 top
J111  [1X04_1MM_RA]  200.91,63.75 0 top
J112  [1X04_1MM_RA]  200.91,78.99 180 top
J113  [1X06_NO_SILK]  238.25,63.75 90 top
J114  [1X06_NO_SILK]  215.39,63.75 90 top
J115  [1X04_1MM_RA]  226.82,63.75 0 top
J116  [1X04_1MM_RA]  226.82,78.99 180 top
J117  [1X06_NO_SILK]  264.16,63.75 90 top
J118  [1X06_NO_SILK]  241.3,63.75 90 top
J119  [1X04_1MM_RA]  252.73,63.75 0 top
J120  [1X04_1MM_RA]  252.73,78.99 180 top
J121  [1X06_NO_SILK]  30.99,89.66 90 top
J122  [1X06_NO_SILK]  8.13,89.66 90 top
J123  [1X04_1MM_RA]  19.56,89.66 0 top
J124  [1X04_1MM_RA]  19.56,104.9 180 top
J125  [1X06_NO_SILK]  56.9,89.66 90 top
J126  [1X06_NO_SILK]  34.04,89.66 90 top
J127  [1X04_1MM_RA]  45.47,89.66 0 top
J128  [1X04_1MM_RA]  45.47,104.9 180 top
J129  [1X06_NO_SILK]  82.8,89.66 90 top
J130  [1X06_NO_SILK]  59.94,89.66 90 top
J131  [1X04_1MM_RA]  71.37,89.66 0 top
J132  [1X04_1MM_RA]  71.37,104.9 180 top
J133  [1X06_NO_SILK]  108.71,89.66 90 top
J134  [1X06_NO_SILK]  85.85,89.66 90 top
J135  [1X04_1MM_RA]  97.28,89.66 0 top
J136  [1X04_1MM_RA]  97.28,104.9 180 top
J137  [1X06_NO_SILK]  134.62,89.66 90 top
J138  [1X06_NO_SILK]  111.76,89.66 90 top
J139  [1X04_1MM_RA]  123.19,89.66 0 top
J140  [1X04_1MM_RA]  123.19,104.9 180 top
J141  [1X06_NO_SILK]  160.53,89.66 90 top
J142  [1X06_NO_SILK]  137.67,89.66 90 top
J143  [1X04_1MM_RA]  149.1,89.66 0 top
J144  [1X04_1MM_RA]  149.1,104.9 180 top
J145  [1X06_NO_SILK]  186.44,89.66 90 top
J146  [1X06_NO_SILK]  163.58,89.66 90 top
J147  [1X04_1MM_RA]  175.01,89.66 0 top
J148  [1X04_1MM_RA]  175.01,104.9 180 top
J149  [1X06_NO_SILK]  212.34,89.66 90 top
J150  [1X06_NO_SILK]  189.48,89.66 90 top
J151  [1X04_1MM_RA]  200.91,89.66 0 top
J152  [1X04_1MM_RA]  200.91,104.9 180 top
J153  [1X06_NO_SILK]  238.25,89.66 90 top
J154  [1X06_NO_SILK]  215.39,89.66 90 top
J155  [1X04_1MM_RA]  226.82,89.66 0 top
J156  [1X04_1MM_RA]  226.82,104.9 180 top
J157  [1X06_NO_SILK]  264.16,89.66 90 top
J158  [1X06_NO_SILK]  241.3,89.66 90 top
J159  [1X04_1MM_RA]  252.73,89.66 0 top
J160  [1X04_1MM_RA]  252.73,104.9 180 top
J161  [1X06_NO_SILK]  30.99,115.57 90 top
J162  [1X06_NO_SILK]  8.13,115.57 90 top
J163  [1X04_1MM_RA]  19.56,115.57 0 top
J164  [1X04_1MM_RA]  19.56,130.81 180 top
J165  [1X06_NO_SILK]  56.9,115.57 90 top
J166  [1X06_NO_SILK]  34.04,115.57 90 top
J167  [1X04_1MM_RA]  45.47,115.57 0 top
J168  [1X04_1MM_RA]  45.47,130.81 180 top
J169  [1X06_NO_SILK]  82.8,115.57 90 top
J170  [1X06_NO_SILK]  59.94,115.57 90 top
J171  [1X04_1MM_RA]  71.37,115.57 0 top
J172  [1X04_1MM_RA]  71.37,130.81 180 top
J173  [1X06_NO_SILK]  108.71,115.57 90 top
J174  [1X06_NO_SILK]  85.85,115.57 90 top
J175  [1X04_1MM_RA]  97.28,115.57 0 top
J176  [1X04_1MM_RA]  97.28,130.81 180 top
J177  [1X06_NO_SILK]  134.62,115.57 90 top
J178  [1X06_NO_SILK]  111.76,115.57 90 top
J179  [1X04_1MM_RA]  123.19,115.57 0 top
J180  [1X04_1MM_RA]  123.19,130.81 180 top
J181  [1X06_NO_SILK]  160.53,115.57 90 top
J182  [1X06_NO_SILK]  137.67,115.57 90 top
J183  [1X04_1MM_RA]  149.1,115.57 0 top
J184  [1X04_1MM_RA]  149.1,130.81 180 top
J185  [1X06_NO_SILK]  186.44,115.57 90 top
J186  [1X06_NO_SILK]  163.58,115.57 90 top
J187  [1X04_1MM_RA]  175.01,115.57 0 top
J188  [1X04_1MM_RA]  175.01,130.81 180 top
J189  [1X06_NO_SILK]  212.34,115.57 90 top
J190  [1X06_NO_SILK]  189.48,115.57 90 top
J191  [1X04_1MM_RA]  200.91,115.57 0 top
J192  [1X04_1MM_RA]  200.91,130.81 180 top
J193  [1X06_NO_SILK]  238.25,115.57 90 top
J194  [1X06_NO_SILK]  215.39,115.57 90 top
J195  [1X04_1MM_RA]  226.82,115.57 0 top
J196  [1X04_1MM_RA]  226.82,130.81 180 top
J197  [1X06_NO_SILK]  264.16,115.57 90 top
J198  [1X06_NO_SILK]  241.3,115.57 90 top
J199  [1X04_1MM_RA]  252.73,115.57 0 top
J200  [1X04_1MM_RA]  252.73,130.81 180 top
JP1  STAND-OFF  [STAND-OFF]  35.31,29.72 0 top
JP2  STAND-OFF  [STAND-OFF]  55.63,29.72 0 top
JP3  STAND-OFF  [STAND-OFF]  9.4,29.72 0 top
JP4  STAND-OFF  [STAND-OFF]  29.72,29.72 0 top
JP5  STAND-OFF  [STAND-OFF]  61.21,29.72 0 top
JP6  STAND-OFF  [STAND-OFF]  81.53,29.72 0 top
JP7  STAND-OFF  [STAND-OFF]  87.12,29.72 0 top
JP8  STAND-OFF  [STAND-OFF]  107.44,29.72 0 top
JP9  STAND-OFF  [STAND-OFF]  113.03,29.72 0 top
JP10  STAND-OFF  [STAND-OFF]  133.35,29.72 0 top
JP11  STAND-OFF  [STAND-OFF]  138.94,29.72 0 top
JP12  STAND-OFF  [STAND-OFF]  159.26,29.72 0 top
JP13  STAND-OFF  [STAND-OFF]  164.85,29.72 0 top
JP14  STAND-OFF  [STAND-OFF]  185.17,29.72 0 top
JP15  STAND-OFF  [STAND-OFF]  190.75,29.72 0 top
JP16  STAND-OFF  [STAND-OFF]  211.07,29.72 0 top
JP17  STAND-OFF  [STAND-OFF]  216.66,29.72 0 top
JP18  STAND-OFF  [STAND-OFF]  236.98,29.72 0 top
JP19  STAND-OFF  [STAND-OFF]  242.57,29.72 0 top
JP20  STAND-OFF  [STAND-OFF]  262.89,29.72 0 top
JP21  STAND-OFF  [STAND-OFF]  9.4,55.63 0 top
JP22  STAND-OFF  [STAND-OFF]  29.72,55.63 0 top
JP23  STAND-OFF  [STAND-OFF]  35.31,55.63 0 top
JP24  STAND-OFF  [STAND-OFF]  55.63,55.63 0 top
JP25  STAND-OFF  [STAND-OFF]  61.21,55.63 0 top
JP26  STAND-OFF  [STAND-OFF]  81.53,55.63 0 top
JP27  STAND-OFF  [STAND-OFF]  87.12,55.63 0 top
JP28  STAND-OFF  [STAND-OFF]  107.44,55.63 0 top
JP29  STAND-OFF  [STAND-OFF]  113.03,55.63 0 top
JP30  STAND-OFF  [STAND-OFF]  133.35,55.63 0 top
JP31  STAND-OFF  [STAND-OFF]  138.94,55.63 0 top
JP32  STAND-OFF  [STAND-OFF]  159.26,55.63 0 top
JP33  STAND-OFF  [STAND-OFF]  164.85,55.63 0 top
JP34  STAND-OFF  [STAND-OFF]  185.17,55.63 0 top
JP35  STAND-OFF  [STAND-OFF]  190.75,55.63 0 top
JP36  STAND-OFF  [STAND-OFF]  211.07,55.63 0 top
JP37  STAND-OFF  [STAND-OFF]  216.66,55.63 0 top
JP38  STAND-OFF  [STAND-OFF]  236.98,55.63 0 top
JP39  STAND-OFF  [STAND-OFF]  242.57,55.63 0 top
JP40  STAND-OFF  [STAND-OFF]  262.89,55.63 0 top
JP41  STAND-OFF  [STAND-OFF]  9.4,81.53 0 top
JP42  STAND-OFF  [STAND-OFF]  29.72,81.53 0 top
JP43  STAND-OFF  [STAND-OFF]  35.31,81.53 0 top
JP44  STAND-OFF  [STAND-OFF]  55.63,81.53 0 top
JP45  STAND-OFF  [STAND-OFF]  61.21,81.53 0 top
JP46  STAND-OFF  [STAND-OFF]  81.53,81.53 0 top
JP47  STAND-OFF  [STAND-OFF]  87.12,81.53 0 top
JP48  STAND-OFF  [STAND-OFF]  107.44,81.53 0 top
JP49  STAND-OFF  [STAND-OFF]  113.03,81.53 0 top
JP50  STAND-OFF  [STAND-OFF]  133.35,81.53 0 top
JP51  STAND-OFF  [STAND-OFF]  138.94,81.53 0 top
JP52  STAND-OFF  [STAND-OFF]  159.26,81.53 0 top
JP53  STAND-OFF  [STAND-OFF]  164.85,81.53 0 top
JP54  STAND-OFF  [STAND-OFF]  185.17,81.53 0 top
JP55  STAND-OFF  [STAND-OFF]  190.75,81.53 0 top
JP56  STAND-OFF  [STAND-OFF]  211.07,81.53 0 top
JP57  STAND-OFF  [STAND-OFF]  216.66,81.53 0 top
JP58  STAND-OFF  [STAND-OFF]  236.98,81.53 0 top
JP59  STAND-OFF  [STAND-OFF]  242.57,81.53 0 top
JP60  STAND-OFF  [STAND-OFF]  262.89,81.53 0 top
JP61  STAND-OFF  [STAND-OFF]  9.4,107.44 0 top
JP62  STAND-OFF  [STAND-OFF]  29.72,107.44 0 top
JP63  STAND-OFF  [STAND-OFF]  35.31,107.44 0 top
JP64  STAND-OFF  [STAND-OFF]  55.63,107.44 0 top
JP65  STAND-OFF  [STAND-OFF]  61.21,107.44 0 top
JP66  STAND-OFF  [STAND-OFF]  81.53,107.44 0 top
JP67  STAND-OFF  [STAND-OFF]  87.12,107.44 0 top
JP68  STAND-OFF  [STAND-OFF]  107.44,107.44 0 top
JP69  STAND-OFF  [STAND-OFF]  113.03,107.44 0 top
JP70  STAND-OFF  [STAND-OFF]  133.35,107.44 0 top
JP71  STAND-OFF  [STAND-OFF]  138.94,107.44 0 top
JP72  STAND-OFF  [STAND-OFF]  159.26,107.44 0 top
JP73  STAND-OFF  [STAND-OFF]  164.85,107.44 0 top
JP74  STAND-OFF  [STAND-OFF]  185.17,107.44 0 top
JP75  STAND-OFF  [STAND-OFF]  190.75,107.44 0 top
JP76  STAND-OFF  [STAND-OFF]  211.07,107.44 0 top
JP77  STAND-OFF  [STAND-OFF]  216.66,107.44 0 top
JP78  STAND-OFF  [STAND-OFF]  236.98,107.44 0 top
JP79  STAND-OFF  [STAND-OFF]  242.57,107.44 0 top
JP80  STAND-OFF  [STAND-OFF]  262.89,107.44 0 top
JP81  STAND-OFF  [STAND-OFF]  9.4,133.35 0 top
JP82  STAND-OFF  [STAND-OFF]  29.72,133.35 0 top
JP83  STAND-OFF  [STAND-OFF]  35.31,133.35 0 top
JP84  STAND-OFF  [STAND-OFF]  55.63,133.35 0 top
JP85  STAND-OFF  [STAND-OFF]  61.21,133.35 0 top
JP86  STAND-OFF  [STAND-OFF]  81.53,133.35 0 top
JP87  STAND-OFF  [STAND-OFF]  87.12,133.35 0 top
JP88  STAND-OFF  [STAND-OFF]  107.44,133.35 0 top
JP89  STAND-OFF  [STAND-OFF]  113.03,133.35 0 top
JP90  STAND-OFF  [STAND-OFF]  133.35,133.35 0 top
JP91  STAND-OFF  [STAND-OFF]  138.94,133.35 0 top
JP92  STAND-OFF  [STAND-OFF]  159.26,133.35 0 top
JP93  STAND-OFF  [STAND-OFF]  164.85,133.35 0 top
JP94  STAND-OFF  [STAND-OFF]  185.17,133.35 0 top
JP95  STAND-OFF  [STAND-OFF]  190.75,133.35 0 top
JP96  STAND-OFF  [STAND-OFF]  211.07,133.35 0 top
JP97  STAND-OFF  [STAND-OFF]  216.66,133.35 0 top
JP98  STAND-OFF  [STAND-OFF]  236.98,133.35 0 top
JP99  STAND-OFF  [STAND-OFF]  242.57,133.35 0 top
JP100  STAND-OFF  [STAND-OFF]  262.89,133.35 0 top
LOGO1  SFE_LOGO_NAME_FLAME.1_INCH  [SFE_LOGO_NAME_FLAME_.1]  25.27,20.95 0 bottom
LOGO2  SFE_LOGO_FLAME.1_INCH  [SFE_LOGO_FLAME_.1]  10.03,7.62 0 top
LOGO3  SFE_LOGO_NAME_FLAME.1_INCH  [SFE_LOGO_NAME_FLAME_.1]  51.18,20.95 0 bottom
LOGO4  SFE_LOGO_FLAME.1_INCH  [SFE_LOGO_FLAME_.1]  35.94,7.62 0 top
LOGO5  SFE_LOGO_NAME_FLAME.1_INCH  [SFE_LOGO_NAME_FLAME_.1]  77.09,20.95 0 bottom
LOGO6  SFE_LOGO_FLAME.1_INCH  [SFE_LOGO_FLAME_.1]  61.85,7.62 0 top
LOGO7  SFE_LOGO_NAME_FLAME.1_INCH  [SFE_LOGO_NAME_FLAME_.1]  103,20.95 0 bottom
LOGO8  SFE_LOGO_FLAME.1_INCH  [SFE_LOGO_FLAME_.1]  87.76,7.62 0 top
LOGO9  SFE_LOGO_NAME_FLAME.1_INCH  [SFE_LOGO_NAME_FLAME_.1]  128.91,20.95 0 bottom
LOGO10  SFE_LOGO_FLAME.1_INCH  [SFE_LOGO_FLAME_.1]  113.67,7.62 0 top
LOGO11  SFE_LOGO_NAME_FLAME.1_INCH  [SFE_LOGO_NAME_FLAME_.1]  154.81,20.95 0 bottom
LOGO12  SFE_LOGO_FLAME.1_INCH  [SFE_LOGO_FLAME_.1]  139.57,7.62 0 top
LOGO13  SFE_LOGO_NAME_FLAME.1_INCH  [SFE_LOGO_NAME_FLAME_.1]  180.72,20.95 0 bottom
LOGO14  SFE_LOGO_FLAME.1_INCH  [SFE_LOGO_FLAME_.1]  165.48,7.62 0 top
LOGO15  SFE_LOGO_NAME_FLAME.1_INCH  [SFE_LOGO_NAME_FLAME_.1]  206.63,20.95 0 bottom
LOGO16  SFE_LOGO_FLAME.1_INCH  [SFE_LOGO_FLAME_.1]  191.39,7.62 0 top
LOGO17  SFE_LOGO_NAME_FLAME.1_INCH  [SFE_LOGO_NAME_FLAME_.1]  232.54,20.95 0 bottom
LOGO18  SFE_LOGO_FLAME.1_INCH  [SFE_LOGO_FLAME_.1]  217.3,7.62 0 top
LOGO19  SFE_LOGO_NAME_FLAME.1_INCH  [SFE_LOGO_NAME_FLAME_.1]  258.44,20.95 0 bottom
LOGO20  SFE_LOGO_FLAME.1_INCH  [SFE_LOGO_FLAME_.1]  243.21,7.62 0 top
LOGO21  SFE_LOGO_NAME_FLAME.1_INCH  [SFE_LOGO_NAME_FLAME_.1]  25.27,46.86 0 bottom
LOGO22  SFE_LOGO_FLAME.1_INCH  [SFE_LOGO_FLAME_.1]  10.03,33.53 0 top
LOGO23  SFE_LOGO_NAME_FLAME.1_INCH  [SFE_LOGO_NAME_FLAME_.1]  51.18,46.86 0 bottom
LOGO24  SFE_LOGO_FLAME.1_INCH  [SFE_LOGO_FLAME_.1]  35.94,33.53 0 top
LOGO25  SFE_LOGO_NAME_FLAME.1_INCH  [SFE_LOGO_NAME_FLAME_.1]  77.09,46.86 0 bottom
LOGO26  SFE_LOGO_FLAME.1_INCH  [SFE_LOGO_FLAME_.1]  61.85,33.53 0 top
LOGO27  SFE_LOGO_NAME_FLAME.1_INCH  [SFE_LOGO_NAME_FLAME_.1]  103,46.86 0 bottom
LOGO28  SFE_LOGO_FLAME.1_INCH  [SFE_LOGO_FLAME_.1]  87.76,33.53 0 top
LOGO29  SFE_LOGO_NAME_FLAME.1_INCH  [SFE_LOGO_NAME_FLAME_.1]  128.91,46.86 0 bottom
LOGO30  SFE_LOGO_FLAME.1_INCH  [SFE_LOGO_FLAME_.1]  113.67,33.53 0 top
LOGO31  SFE_LOGO_NAME_FLAME.1_INCH  [SFE_LOGO_NAME_FLAME_.1]  154.81,46.86 0 bottom
LOGO32  SFE_LOGO_FLAME.1_INCH  [SFE_LOGO_FLAME_.1]  139.57,33.53 0 top
LOGO33  SFE_LOGO_NAME_FLAME.1_INCH  [SFE_LOGO_NAME_FLAME_.1]  180.72,46.86 0 bottom
LOGO34  SFE_LOGO_FLAME.1_INCH  [SFE_LOGO_FLAME_.1]  165.48,33.53 0 top
LOGO35  SFE_LOGO_NAME_FLAME.1_INCH  [SFE_LOGO_NAME_FLAME_.1]  206.63,46.86 0 bottom
LOGO36  SFE_LOGO_FLAME.1_INCH  [SFE_LOGO_FLAME_.1]  191.39,33.53 0 top
LOGO37  SFE_LOGO_NAME_FLAME.1_INCH  [SFE_LOGO_NAME_FLAME_.1]  232.54,46.86 0 bottom
LOGO38  SFE_LOGO_FLAME.1_INCH  [SFE_LOGO_FLAME_.1]  217.3,33.53 0 top
LOGO39  SFE_LOGO_NAME_FLAME.1_INCH  [SFE_LOGO_NAME_FLAME_.1]  258.44,46.86 0 bottom
LOGO40  SFE_LOGO_FLAME.1_INCH  [SFE_LOGO_FLAME_.1]  243.21,33.53 0 top
LOGO41  SFE_LOGO_NAME_FLAME.1_INCH  [SFE_LOGO_NAME_FLAME_.1]  25.27,72.77 0 bottom
LOGO42  SFE_LOGO_FLAME.1_INCH  [SFE_LOGO_FLAME_.1]  10.03,59.44 0 top
LOGO43  SFE_LOGO_NAME_FLAME.1_INCH  [SFE_LOGO_NAME_FLAME_.1]  51.18,72.77 0 bottom
LOGO44  SFE_LOGO_FLAME.1_INCH  [SFE_LOGO_FLAME_.1]  35.94,59.44 0 top
LOGO45  SFE_LOGO_NAME_FLAME.1_INCH  [SFE_LOGO_NAME_FLAME_.1]  77.09,72.77 0 bottom
LOGO46  SFE_LOGO_FLAME.1_INCH  [SFE_LOGO_FLAME_.1]  61.85,59.44 0 top
LOGO47  SFE_LOGO_NAME_FLAME.1_INCH  [SFE_LOGO_NAME_FLAME_.1]  103,72.77 0 bottom
LOGO48  SFE_LOGO_FLAME.1_INCH  [SFE_LOGO_FLAME_.1]  87.76,59.44 0 top
LOGO49  SFE_LOGO_NAME_FLAME.1_INCH  [SFE_LOGO_NAME_FLAME_.1]  128.91,72.77 0 bottom
LOGO50  SFE_LOGO_FLAME.1_INCH  [SFE_LOGO_FLAME_.1]  113.67,59.44 0 top
LOGO51  SFE_LOGO_NAME_FLAME.1_INCH  [SFE_LOGO_NAME_FLAME_.1]  154.81,72.77 0 bottom
LOGO52  SFE_LOGO_FLAME.1_INCH  [SFE_LOGO_FLAME_.1]  139.57,59.44 0 top
LOGO53  SFE_LOGO_NAME_FLAME.1_INCH  [SFE_LOGO_NAME_FLAME_.1]  180.72,72.77 0 bottom
LOGO54  SFE_LOGO_FLAME.1_INCH  [SFE_LOGO_FLAME_.1]  165.48,59.44 0 top
LOGO55  SFE_LOGO_NAME_FLAME.1_INCH  [SFE_LOGO_NAME_FLAME_.1]  206.63,72.77 0 bottom
LOGO56  SFE_LOGO_FLAME.1_INCH  [SFE_LOGO_FLAME_.1]  191.39,59.44 0 top
LOGO57  SFE_LOGO_NAME_FLAME.1_INCH  [SFE_LOGO_NAME_FLAME_.1]  232.54,72.77 0 bottom
LOGO58  SFE_LOGO_FLAME.1_INCH  [SFE_LOGO_FLAME_.1]  217.3,59.44 0 top
LOGO59  SFE_LOGO_NAME_FLAME.1_INCH  [SFE_LOGO_NAME_FLAME_.1]  258.44,72.77 0 bottom
LOGO60  SFE_LOGO_FLAME.1_INCH  [SFE_LOGO_FLAME_.1]  243.21,59.44 0 top
LOGO61  SFE_LOGO_NAME_FLAME.1_INCH  [SFE_LOGO_NAME_FLAME_.1]  25.27,98.68 0 bottom
LOGO62  SFE_LOGO_FLAME.1_INCH  [SFE_LOGO_FLAME_.1]  10.03,85.34 0 top
LOGO63  SFE_LOGO_NAME_FLAME.1_INCH  [SFE_LOGO_NAME_FLAME_.1]  51.18,98.68 0 bottom
LOGO64  SFE_LOGO_FLAME.1_INCH  [SFE_LOGO_FLAME_.1]  35.94,85.34 0 top
LOGO65  SFE_LOGO_NAME_FLAME.1_INCH  [SFE_LOGO_NAME_FLAME_.1]  77.09,98.68 0 bottom
LOGO66  SFE_LOGO_FLAME.1_INCH  [SFE_LOGO_FLAME_.1]  61.85,85.34 0 top
LOGO67  SFE_LOGO_NAME_FLAME.1_INCH  [SFE_LOGO_NAME_FLAME_.1]  103,98.68 0 bottom
LOGO68  SFE_LOGO_FLAME.1_INCH  [SFE_LOGO_FLAME_.1]  87.76,85.34 0 top
LOGO69  SFE_LOGO_NAME_FLAME.1_INCH  [SFE_LOGO_NAME_FLAME_.1]  128.91,98.68 0 bottom
LOGO70  SFE_LOGO_FLAME.1_INCH  [SFE_LOGO_FLAME_.1]  113.67,85.34 0 top
LOGO71  SFE_LOGO_NAME_FLAME.1_INCH  [SFE_LOGO_NAME_FLAME_.1]  154.81,98.68 0 bottom
LOGO72  SFE_LOGO_FLAME.1_INCH  [SFE_LOGO_FLAME_.1]  139.57,85.34 0 top
LOGO73  SFE_LOGO_NAME_FLAME.1_INCH  [SFE_LOGO_NAME_FLAME_.1]  180.72,98.68 0 bottom
LOGO74  SFE_LOGO_FLAME.1_INCH  [SFE_LOGO_FLAME_.1]  165.48,85.34 0 top
LOGO75  SFE_LOGO_NAME_FLAME.1_INCH  [SFE_LOGO_NAME_FLAME_.1]  206.63,98.68 0 bottom
LOGO76  SFE_LOGO_FLAME.1_INCH  [SFE_LOGO_FLAME_.1]  191.39,85.34 0 top
LOGO77  SFE_LOGO_NAME_FLAME.1_INCH  [SFE_LOGO_NAME_FLAME_.1]  232.54,98.68 0 bottom
LOGO78  SFE_LOGO_FLAME.1_INCH  [SFE_LOGO_FLAME_.1]  217.3,85.34 0 top
LOGO79  SFE_LOGO_NAME_FLAME.1_INCH  [SFE_LOGO_NAME_FLAME_.1]  258.44,98.68 0 bottom
LOGO80  SFE_LOGO_FLAME.1_INCH  [SFE_LOGO_FLAME_.1]  243.21,85.34 0 top
LOGO81  SFE_LOGO_NAME_FLAME.1_INCH  [SFE_LOGO_NAME_FLAME_.1]  25.27,124.59 0 bottom
LOGO82  SFE_LOGO_FLAME.1_INCH  [SFE_LOGO_FLAME_.1]  10.03,111.25 0 top
LOGO83  SFE_LOGO_NAME_FLAME.1_INCH  [SFE_LOGO_NAME_FLAME_.1]  51.18,124.59 0 bottom
LOGO84  SFE_LOGO_FLAME.1_INCH  [SFE_LOGO_FLAME_.1]  35.94,111.25 0 top
LOGO85  SFE_LOGO_NAME_FLAME.1_INCH  [SFE_LOGO_NAME_FLAME_.1]  77.09,124.59 0 bottom
LOGO86  SFE_LOGO_FLAME.1_INCH  [SFE_LOGO_FLAME_.1]  61.85,111.25 0 top
LOGO87  SFE_LOGO_NAME_FLAME.1_INCH  [SFE_LOGO_NAME_FLAME_.1]  103,124.59 0 bottom
LOGO88  SFE_LOGO_FLAME.1_INCH  [SFE_LOGO_FLAME_.1]  87.76,111.25 0 top
LOGO89  SFE_LOGO_NAME_FLAME.1_INCH  [SFE_LOGO_NAME_FLAME_.1]  128.91,124.59 0 bottom
LOGO90  SFE_LOGO_FLAME.1_INCH  [SFE_LOGO_FLAME_.1]  113.67,111.25 0 top
LOGO91  SFE_LOGO_NAME_FLAME.1_INCH  [SFE_LOGO_NAME_FLAME_.1]  154.81,124.59 0 bottom
LOGO92  SFE_LOGO_FLAME.1_INCH  [SFE_LOGO_FLAME_.1]  139.57,111.25 0 top
LOGO93  SFE_LOGO_NAME_FLAME.1_INCH  [SFE_LOGO_NAME_FLAME_.1]  180.72,124.59 0 bottom
LOGO94  SFE_LOGO_FLAME.1_INCH  [SFE_LOGO_FLAME_.1]  165.48,111.25 0 top
LOGO95  SFE_LOGO_NAME_FLAME.1_INCH  [SFE_LOGO_NAME_FLAME_.1]  206.63,124.59 0 bottom
LOGO96  SFE_LOGO_FLAME.1_INCH  [SFE_LOGO_FLAME_.1]  191.39,111.25 0 top
LOGO97  SFE_LOGO_NAME_FLAME.1_INCH  [SFE_LOGO_NAME_FLAME_.1]  232.54,124.59 0 bottom
LOGO98  SFE_LOGO_FLAME.1_INCH  [SFE_LOGO_FLAME_.1]  217.3,111.25 0 top
LOGO99  SFE_LOGO_NAME_FLAME.1_INCH  [SFE_LOGO_NAME_FLAME_.1]  258.44,124.59 0 bottom
LOGO100  SFE_LOGO_FLAME.1_INCH  [SFE_LOGO_FLAME_.1]  243.21,111.25 0 top
R1  10k  [0603]  23.37,23.37 180 top
R2  10k  [0603]  15.75,23.37 0 top
R3  10k  [0603]  49.28,23.37 180 top
R4  10k  [0603]  41.66,23.37 0 top
R5  10k  [0603]  75.18,23.37 180 top
R6  10k  [0603]  67.56,23.37 0 top
R7  10k  [0603]  101.09,23.37 180 top
R8  10k  [0603]  93.47,23.37 0 top
R9  10k  [0603]  127,23.37 180 top
R10  10k  [0603]  119.38,23.37 0 top
R11  10k  [0603]  152.91,23.37 180 top
R12  10k  [0603]  145.29,23.37 0 top
R13  10k  [0603]  178.82,23.37 180 top
R14  10k  [0603]  171.2,23.37 0 top
R15  10k  [0603]  204.72,23.37 180 top
R16  10k  [0603]  197.1,23.37 0 top
R17  10k  [0603]  230.63,23.37 180 top
R18  10k  [0603]  223.01,23.37 0 top
R19  10k  [0603]  256.54,23.37 180 top
R20  10k  [0603]  248.92,23.37 0 top
R21  10k  [0603]  23.37,49.28 180 top
R22  10k  [0603]  15.75,49.28 0 top
R23  10k  [0603]  49.28,49.28 180 top
R24  10k  [0603]  41.66,49.28 0 top
R25  10k  [0603]  75.18,49.28 180 top
R26  10k  [0603]  67.56,49.28 0 top
R27  10k  [0603]  101.09,49.28 180 top
R28  10k  [0603]  93.47,49.28 0 top
R29  10k  [0603]  127,49.28 180 top
R30  10k  [0603]  119.38,49.28 0 top
R31  10k  [0603]  152.91,49.28 180 top
R32  10k  [0603]  145.29,49.28 0 top
R33  10k  [0603]  178.82,49.28 180 top
R34  10k  [0603]  171.2,49.28 0 top
R35  10k  [0603]  204.72,49.28 180 top
R36  10k  [0603]  197.1,49.28 0 top
R37  10k  [0603]  230.63,49.28 180 top
R38  10k  [0603]  223.01,49.28 0 top
R39  10k  [0603]  256.54,49.28 180 top
R40  10k  [0603]  248.92,49.28 0 top
R41  10k  [0603]  23.37,75.18 180 top
R42  10k  [0603]  15.75,75.18 0 top
R43  10k  [0603]  49.28,75.18 180 top
R44  10k  [0603]  41.66,75.18 0 top
R45  10k  [0603]  75.18,75.18 180 top
R46  10k  [0603]  67.56,75.18 0 top
R47  10k  [0603]  101.09,75.18 180 top
R48  10k  [0603]  93.47,75.18 0 top
R49  10k  [0603]  127,75.18 180 top
R50  10k  [0603]  119.38,75.18 0 top
R51  10k  [0603]  152.91,75.18 180 top
R52  10k  [0603]  145.29,75.18 0 top
R53  10k  [0603]  178.82,75.18 180 top
R54  10k  [0603]  171.2,75.18 0 top
R55  10k  [0603]  204.72,75.18 180 top
R56  10k  [0603]  197.1,75.18 0 top
R57  10k  [0603]  230.63,75.18 180 top
R58  10k  [0603]  223.01,75.18 0 top
R59  10k  [0603]  256.54,75.18 180 top
R60  10k  [0603]  248.92,75.18 0 top
R61  10k  [0603]  23.37,101.09 180 top
R62  10k  [0603]  15.75,101.09 0 top
R63  10k  [0603]  49.28,101.09 180 top
R64  10k  [0603]  41.66,101.09 0 top
R65  10k  [0603]  75.18,101.09 180 top
R66  10k  [0603]  67.56,101.09 0 top
R67  10k  [0603]  101.09,101.09 180 top
R68  10k  [0603]  93.47,101.09 0 top
R69  10k  [0603]  127,101.09 180 top
R70  10k  [0603]  119.38,101.09 0 top
R71  10k  [0603]  152.91,101.09 180 top
R72  10k  [0603]  145.29,101.09 0 top
R73  10k  [0603]  178.82,101.09 180 top
R74  10k  [0603]  171.2,101.09 0 top
R75  10k  [0603]  204.72,101.09 180 top
R76  10k  [0603]  197.1,101.09 0 top
R77  10k  [0603]  230.63,101.09 180 top
R78  10k  [0603]  223.01,101.09 0 top
R79  10k  [0603]  256.54,101.09 180 top
R80  10k  [0603]  248.92,101.09 0 top
R81  10k  [0603]  23.37,127 180 top
R82  10k  [0603]  15.75,127 0 top
R83  10k  [0603]  49.28,127 180 top
R84  10k  [0603]  41.66,127 0 top
R85  10k  [0603]  75.18,127 180 top
R86  10k  [0603]  67.56,127 0 top
R87  10k  [0603]  101.09,127 180 top
R88  10k  [0603]  93.47,127 0 top
R89  10k  [0603]  127,127 180 top
R90  10k  [0603]  119.38,127 0 top
R91  10k  [0603]  152.91,127 180 top
R92  10k  [0603]  145.29,127 0 top
R93  10k  [0603]  178.82,127 180 top
R94  10k  [0603]  171.2,127 0 top
R95  10k  [0603]  204.72,127 180 top
R96  10k  [0603]  197.1,127 0 top
R97  10k  [0603]  230.63,127 180 top
R98  10k  [0603]  223.01,127 0 top
R99  10k  [0603]  256.54,127 180 top
R100  10k  [0603]  248.92,127 0 top
SJ1  [SMT-JUMPER_2_NC_TRACE_SILK]  19.56,29.72 180 bottom
SJ2  [PAD-JUMPER-3-3OF3_NC_BY_TRACE_YES_SILK_FULL_BOX]  19.56,27.18 180 bottom
SJ3  [SMT-JUMPER_3_1-NC_TRACE_SILK]  24,11.94 180 bottom
SJ4  [SMT-JUMPER_3_1-NC_TRACE_SILK]  15.11,11.94 180 bottom
SJ5  [PAD-JUMPER-3-3OF3_NC_BY_TRACE_YES_SILK_FULL_BOX]  45.47,27.18 180 bottom
SJ6  [SMT-JUMPER_3_1-NC_TRACE_SILK]  49.91,11.94 180 bottom
SJ7  [SMT-JUMPER_3_1-NC_TRACE_SILK]  41.02,11.94 180 bottom
SJ8  [SMT-JUMPER_2_NC_TRACE_SILK]  45.47,29.72 180 bottom
SJ9  [PAD-JUMPER-3-3OF3_NC_BY_TRACE_YES_SILK_FULL_BOX]  71.37,27.18 180 bottom
SJ10  [SMT-JUMPER_3_1-NC_TRACE_SILK]  75.82,11.94 180 bottom
SJ11  [SMT-JUMPER_3_1-NC_TRACE_SILK]  66.93,11.94 180 bottom
SJ12  [SMT-JUMPER_2_NC_TRACE_SILK]  71.37,29.72 180 bottom
SJ13  [PAD-JUMPER-3-3OF3_NC_BY_TRACE_YES_SILK_FULL_BOX]  97.28,27.18 180 bottom
SJ14  [SMT-JUMPER_3_1-NC_TRACE_SILK]  101.73,11.94 180 bottom
SJ15  [SMT-JUMPER_3_1-NC_TRACE_SILK]  92.84,11.94 180 bottom
SJ16  [SMT-JUMPER_2_NC_TRACE_SILK]  97.28,29.72 180 bottom
SJ17  [PAD-JUMPER-3-3OF3_NC_BY_TRACE_YES_SILK_FULL_BOX]  123.19,27.18 180 bottom
SJ18  [SMT-JUMPER_3_1-NC_TRACE_SILK]  127.64,11.94 180 bottom
SJ19  [SMT-JUMPER_3_1-NC_TRACE_SILK]  118.75,11.94 180 bottom
SJ20  [SMT-JUMPER_2_NC_TRACE_SILK]  123.19,29.72 180 bottom
SJ21  [PAD-JUMPER-3-3OF3_NC_BY_TRACE_YES_SILK_FULL_BOX]  149.1,27.18 180 bottom
SJ22  [SMT-JUMPER_3_1-NC_TRACE_SILK]  153.54,11.94 180 bottom
SJ23  [SMT-JUMPER_3_1-NC_TRACE_SILK]  144.65,11.94 180 bottom
SJ24  [SMT-JUMPER_2_NC_TRACE_SILK]  149.1,29.72 180 bottom
SJ25  [PAD-JUMPER-3-3OF3_NC_BY_TRACE_YES_SILK_FULL_BOX]  175.01,27.18 180 bottom
SJ26  [SMT-JUMPER_3_1-NC_TRACE_SILK]  179.45,11.94 180 bottom
SJ27  [SMT-JUMPER_3_1-NC_TRACE_SILK]  170.56,11.94 180 bottom
SJ28  [SMT-JUMPER_2_NC_TRACE_SILK]  175.01,29.72 180 bottom
SJ29  [PAD-JUMPER-3-3OF3_NC_BY_TRACE_YES_SILK_FULL_BOX]  200.91,27.18 180 bottom
SJ30  [SMT-JUMPER_3_1-NC_TRACE_SILK]  205.36,11.94 180 bottom
SJ31  [SMT-JUMPER_3_1-NC_TRACE_SILK]  196.47,11.94 180 bottom
SJ32  [SMT-JUMPER_2_NC_TRACE_SILK]  200.91,29.72 180 bottom
SJ33  [PAD-JUMPER-3-3OF3_NC_BY_TRACE_YES_SILK_FULL_BOX]  226.82,27.18 180 bottom
SJ34  [SMT-JUMPER_3_1-NC_TRACE_SILK]  231.27,11.94 180 bottom
SJ35  [SMT-JUMPER_3_1-NC_TRACE_SILK]  222.38,11.94 180 bottom
SJ36  [SMT-JUMPER_2_NC_TRACE_SILK]  226.82,29.72 180 bottom
SJ37  [PAD-JUMPER-3-3OF3_NC_BY_TRACE_YES_SILK_FULL_BOX]  252.73,27.18 180 bottom
SJ38  [SMT-JUMPER_3_1-NC_TRACE_SILK]  257.18,11.94 180 bottom
SJ39  [SMT-JUMPER_3_1-NC_TRACE_SILK]  248.28,11.94 180 bottom
SJ40  [SMT-JUMPER_2_NC_TRACE_SILK]  252.73,29.72 180 bottom
SJ41  [PAD-JUMPER-3-3OF3_NC_BY_TRACE_YES_SILK_FULL_BOX]  19.56,53.09 180 bottom
SJ42  [SMT-JUMPER_3_1-NC_TRACE_SILK]  24,37.85 180 bottom
SJ43  [SMT-JUMPER_3_1-NC_TRACE_SILK]  15.11,37.85 180 bottom
SJ44  [SMT-JUMPER_2_NC_TRACE_SILK]  19.56,55.63 180 bottom
SJ45  [PAD-JUMPER-3-3OF3_NC_BY_TRACE_YES_SILK_FULL_BOX]  45.47,53.09 180 bottom
SJ46  [SMT-JUMPER_3_1-NC_TRACE_SILK]  49.91,37.85 180 bottom
SJ47  [SMT-JUMPER_3_1-NC_TRACE_SILK]  41.02,37.85 180 bottom
SJ48  [SMT-JUMPER_2_NC_TRACE_SILK]  45.47,55.63 180 bottom
SJ49  [PAD-JUMPER-3-3OF3_NC_BY_TRACE_YES_SILK_FULL_BOX]  71.37,53.09 180 bottom
SJ50  [SMT-JUMPER_3_1-NC_TRACE_SILK]  75.82,37.85 180 bottom
SJ51  [SMT-JUMPER_3_1-NC_TRACE_SILK]  66.93,37.85 180 bottom
SJ52  [SMT-JUMPER_2_NC_TRACE_SILK]  71.37,55.63 180 bottom
SJ53  [PAD-JUMPER-3-3OF3_NC_BY_TRACE_YES_SILK_FULL_BOX]  97.28,53.09 180 bottom
SJ54  [SMT-JUMPER_3_1-NC_TRACE_SILK]  101.73,37.85 180 bottom
SJ55  [SMT-JUMPER_3_1-NC_TRACE_SILK]  92.84,37.85 180 bottom
SJ56  [SMT-JUMPER_2_NC_TRACE_SILK]  97.28,55.63 180 bottom
SJ57  [PAD-JUMPER-3-3OF3_NC_BY_TRACE_YES_SILK_FULL_BOX]  123.19,53.09 180 bottom
SJ58  [SMT-JUMPER_3_1-NC_TRACE_SILK]  127.64,37.85 180 bottom
SJ59  [SMT-JUMPER_3_1-NC_TRACE_SILK]  118.75,37.85 180 bottom
SJ60  [SMT-JUMPER_2_NC_TRACE_SILK]  123.19,55.63 180 bottom
SJ61  [PAD-JUMPER-3-3OF3_NC_BY_TRACE_YES_SILK_FULL_BOX]  149.1,53.09 180 bottom
SJ62  [SMT-JUMPER_3_1-NC_TRACE_SILK]  153.54,37.85 180 bottom
SJ63  [SMT-JUMPER_3_1-NC_TRACE_SILK]  144.65,37.85 180 bottom
SJ64  [SMT-JUMPER_2_NC_TRACE_SILK]  149.1,55.63 180 bottom
SJ65  [PAD-JUMPER-3-3OF3_NC_BY_TRACE_YES_SILK_FULL_BOX]  175.01,53.09 180 bottom
SJ66  [SMT-JUMPER_3_1-NC_TRACE_SILK]  179.45,37.85 180 bottom
SJ67  [SMT-JUMPER_3_1-NC_TRACE_SILK]  170.56,37.85 180 bottom
SJ68  [SMT-JUMPER_2_NC_TRACE_SILK]  175.01,55.63 180 bottom
SJ69  [PAD-JUMPER-3-3OF3_NC_BY_TRACE_YES_SILK_FULL_BOX]  200.91,53.09 180 bottom
SJ70  [SMT-JUMPER_3_1-NC_TRACE_SILK]  205.36,37.85 180 bottom
SJ71  [SMT-JUMPER_3_1-NC_TRACE_SILK]  196.47,37.85 180 bottom
SJ72  [SMT-JUMPER_2_NC_TRACE_SILK]  200.91,55.63 180 bottom
SJ73  [PAD-JUMPER-3-3OF3_NC_BY_TRACE_YES_SILK_FULL_BOX]  226.82,53.09 180 bottom
SJ74  [SMT-JUMPER_3_1-NC_TRACE_SILK]  231.27,37.85 180 bottom
SJ75  [SMT-JUMPER_3_1-NC_TRACE_SILK]  222.38,37.85 180 bottom
SJ76  [SMT-JUMPER_2_NC_TRACE_SILK]  226.82,55.63 180 bottom
SJ77  [PAD-JUMPER-3-3OF3_NC_BY_TRACE_YES_SILK_FULL_BOX]  252.73,53.09 180 bottom
SJ78  [SMT-JUMPER_3_1-NC_TRACE_SILK]  257.18,37.85 180 bottom
SJ79  [SMT-JUMPER_3_1-NC_TRACE_SILK]  248.28,37.85 180 bottom
SJ80  [SMT-JUMPER_2_NC_TRACE_SILK]  252.73,55.63 180 bottom
SJ81  [PAD-JUMPER-3-3OF3_NC_BY_TRACE_YES_SILK_FULL_BOX]  19.56,78.99 180 bottom
SJ82  [SMT-JUMPER_3_1-NC_TRACE_SILK]  24,63.75 180 bottom
SJ83  [SMT-JUMPER_3_1-NC_TRACE_SILK]  15.11,63.75 180 bottom
SJ84  [SMT-JUMPER_2_NC_TRACE_SILK]  19.56,81.53 180 bottom
SJ85  [PAD-JUMPER-3-3OF3_NC_BY_TRACE_YES_SILK_FULL_BOX]  45.47,78.99 180 bottom
SJ86  [SMT-JUMPER_3_1-NC_TRACE_SILK]  49.91,63.75 180 bottom
SJ87  [SMT-JUMPER_3_1-NC_TRACE_SILK]  41.02,63.75 180 bottom
SJ88  [SMT-JUMPER_2_NC_TRACE_SILK]  45.47,81.53 180 bottom
SJ89  [PAD-JUMPER-3-3OF3_NC_BY_TRACE_YES_SILK_FULL_BOX]  71.37,78.99 180 bottom
SJ90  [SMT-JUMPER_3_1-NC_TRACE_SILK]  75.82,63.75 180 bottom
SJ91  [SMT-JUMPER_3_1-NC_TRACE_SILK]  66.93,63.75 180 bottom
SJ92  [SMT-JUMPER_2_NC_TRACE_SILK]  71.37,81.53 180 bottom
SJ93  [PAD-JUMPER-3-3OF3_NC_BY_TRACE_YES_SILK_FULL_BOX]  97.28,78.99 180 bottom
SJ94  [SMT-JUMPER_3_1-NC_TRACE_SILK]  101.73,63.75 180 bottom
SJ95  [SMT-JUMPER_3_1-NC_TRACE_SILK]  92.84,63.75 180 bottom
SJ96  [SMT-JUMPER_2_NC_TRACE_SILK]  97.28,81.53 180 bottom
SJ97  [PAD-JUMPER-3-3OF3_NC_BY_TRACE_YES_SILK_FULL_BOX]  123.19,78.99 180 bottom
SJ98  [SMT-JUMPER_3_1-NC_TRACE_SILK]  127.64,63.75 180 bottom
SJ99  [SMT-JUMPER_3_1-NC_TRACE_SILK]  118.75,63.75 180 bottom
SJ100  [SMT-JUMPER_2_NC_TRACE_SILK]  123.19,81.53 180 bottom
SJ101  [PAD-JUMPER-3-3OF3_NC_BY_TRACE_YES_SILK_FULL_BOX]  149.1,78.99 180 bottom
SJ102  [SMT-JUMPER_3_1-NC_TRACE_SILK]  153.54,63.75 180 bottom
SJ103  [SMT-JUMPER_3_1-NC_TRACE_SILK]  144.65,63.75 180 bottom